# EAGLE board BP (EAGLE 7.7.0)
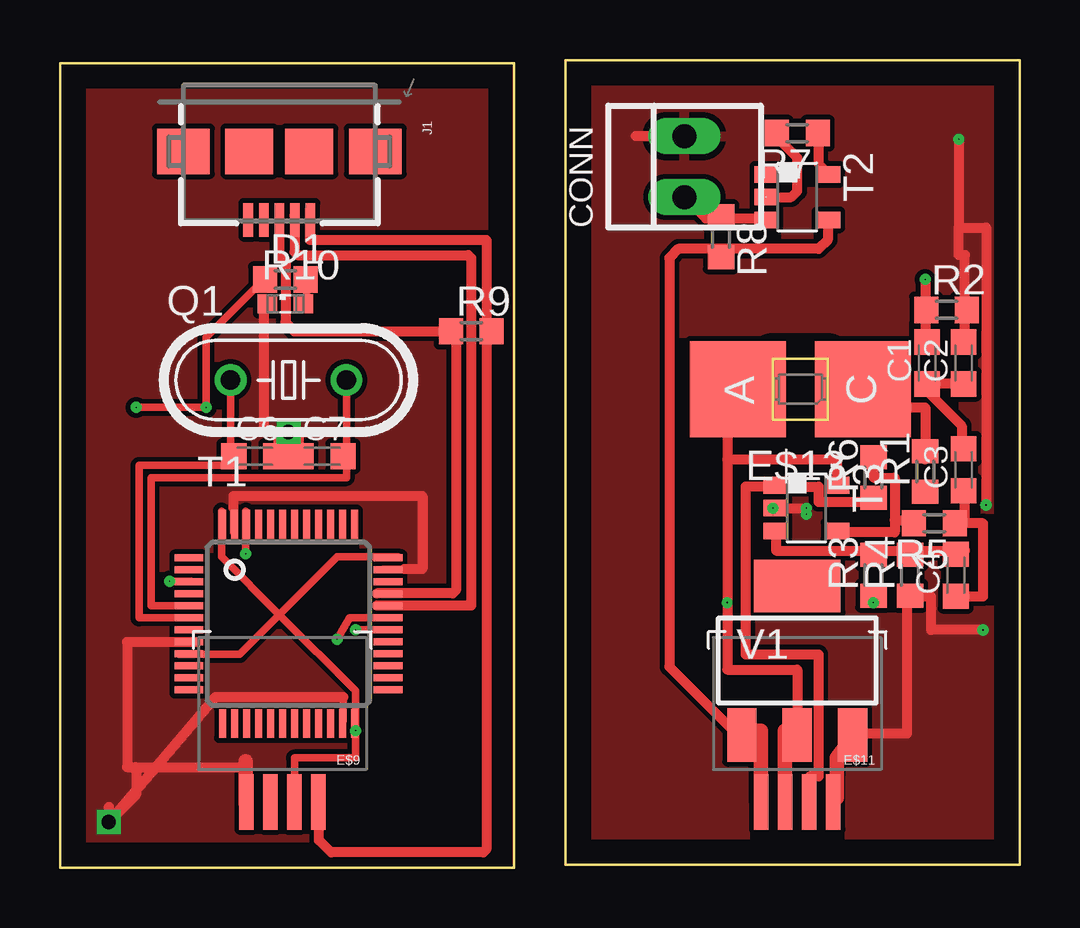
[diagram p0: board, top side]
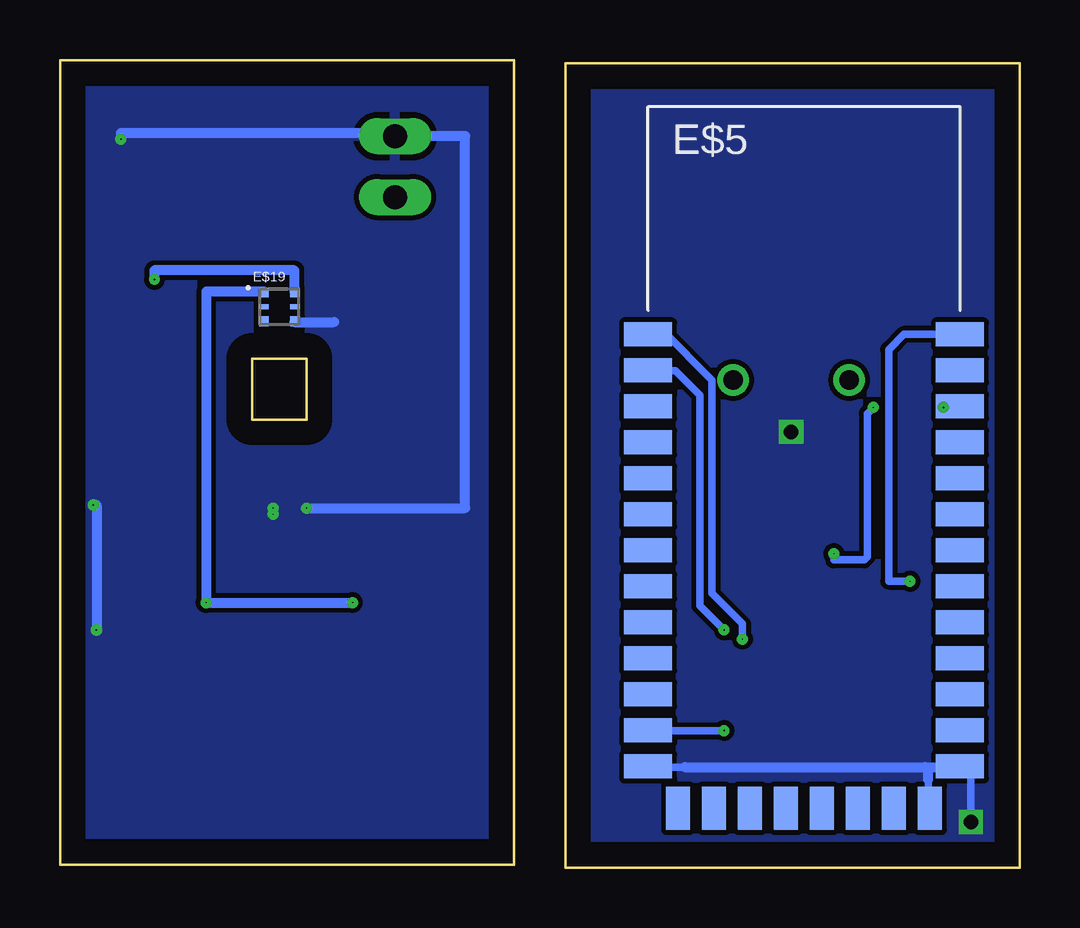
[diagram p1: board, bottom side, seen from below]

Size 40 x 33.66 mm. Coordinates in mm from the lower left corner, seen from the top.
Copper layers (1*16): Top 0.035mm / dielectric 1.5mm / Bottom 0.035mm
Design rules "default": minimum track width 10mil, minimum drill 24mil, track to track 8mil, track to pad 8mil, pad to pad 8mil, via to via 8mil, smd to smd 8mil, copper to edge 40mil, drill to drill 8mil, minimum pad ring 10mil, minimum via ring 8mil, stop-mask expansion 4mil, vias tented up to drill 0mil, thermal gap 10mil

## Footprints (pad centres in the part's own frame; a part is rotated, then mirrored left to right if it is on the bottom)
C0603K = smd 1.05 x 1.08: 1 -0.875,0; 2 0.875,0
22-23-2021 = drill 1 long: 1 -1.27,0; 2 1.27,0
R0603 = smd 1 x 1.1: 1 -0.85,0; 2 0.85,0
BLUETOOTH_SMD = smd 2 x 1: 1 -6.35,3.81; 2 -6.35,2.31; 3 -6.35,0.81; 4 -6.35,-0.69; 5 -6.35,-2.19; 6 -6.35,-3.69; 7 -6.35,-5.19; 8 -6.35,-6.69; 9 -6.35,-8.19; 10 -6.35,-9.69; 11 -6.35,-11.19; 12 -6.35,-12.69; 13 -6.35,-14.19; 22 6.65,-14.19; 23 6.65,-12.69; 24 6.65,-11.19; 25 6.65,-9.69; 26 6.65,-8.19; 27 6.65,-6.69; 28 6.65,-5.19; 29 6.65,-3.69; 30 6.65,-2.19; 31 6.65,-0.69; 32 6.65,0.81; 33 6.65,2.31; 34 6.65,3.81 | smd 1 x 1.8: 14 -5.1,-15.94; 15 -3.6,-15.94; 16 -2.1,-15.94; 17 -0.6,-15.94; 18 0.9,-15.94; 19 2.4,-15.94; 20 3.9,-15.94; 21 5.4,-15.94
PSP_TOUCH_CONNECTOR = smd 0.6 x 2.3: X1 1.5,2.85; X2 -0.5,2.85; Y1 -1.5,2.85; Y2 0.5,2.85
OSRAM-MINI-TOP-LED = smd 4 x 4: A 0,2.6; C 0,-2.6
PHODET_APDS-9008 = smd 0.4 x 0.4: 1 -0.65,0.6; 3 -0.65,-0.6; 4 0.65,-0.6; 6 0.65,0.6 | smd 0.4 x 0.2: 2 -0.65,0; 5 0.65,0
USB-AB-MICRO-SMD = smd 1.4 x 0.4: D+ 2.85,0; D- 2.85,0.65; GND 2.85,-1.3; ID 2.85,-0.65; VBUS 2.85,1.3 | smd 1.9 x 2.2: SHIELD1 0,4; SHIELD4 0,-4 | smd 1.9 x 2: SHIELD2 0,1.25; SHIELD3 0,-1.25
HC49/S = drill 0.813: 1 -2.413,0; 2 2.413,0
LED_SML0603 = smd 0.8 x 0.8: A 0.75,0; C -0.75,0
TQFP48_7X7 = smd 0.3 x 1.2: 1 -2.75,-4.15; 2 -2.25,-4.15; 3 -1.75,-4.15; 4 -1.25,-4.15; 5 -0.75,-4.15; 6 -0.25,-4.15; 7 0.25,-4.15; 8 0.75,-4.15; 9 1.25,-4.15; 10 1.75,-4.15; 11 2.25,-4.15; 12 2.75,-4.15; 25 2.75,4.15; 26 2.25,4.15; 27 1.75,4.15; 28 1.25,4.15; 29 0.75,4.15; 30 0.25,4.15; 31 -0.25,4.15; 32 -0.75,4.15; 33 -1.25,4.15; 34 -1.75,4.15; 35 -2.25,4.15; 36 -2.75,4.15 | smd 1.2 x 0.3: 13 4.15,-2.75; 14 4.15,-2.25; 15 4.15,-1.75; 16 4.15,-1.25; 17 4.15,-0.75; 18 4.15,-0.25; 19 4.15,0.25; 20 4.15,0.75; 21 4.15,1.25; 22 4.15,1.75; 23 4.15,2.25; 24 4.15,2.75; 37 -4.15,2.75; 38 -4.15,2.25; 39 -4.15,1.75; 40 -4.15,1.25; 41 -4.15,0.75; 42 -4.15,0.25; 43 -4.15,-0.25; 44 -4.15,-0.75; 45 -4.15,-1.25; 46 -4.15,-1.75; 47 -4.15,-2.25; 48 -4.15,-2.75
DBV_R-PDSO-G5 = smd 0.69 x 0.99: 1 -0.95,-1.29; 2 0,-1.29; 3 0.95,-1.29; 4 0.95,1.3; 5 -0.95,1.3
SOT223 = smd 1.219 x 2.235: 1 -2.311,-3.099; 2 0,-3.099; 3 2.311,-3.099 | smd 3.6 x 2.2: 4 0,3.099

## Placement (x,y rotation side)
C1  [C0603K]  36.14,21.03 90 top
C2  [C0603K]  37.67,21.03 90 top
C3  [C0603K]  37.67,16.59 90 top
C4  [C0603K]  37.34,12.19 90 top
C6  [C0603K]  8.13,17.14 0 top
C7  [C0603K]  10.92,17.14 0 top
CONN  [22-23-2021]  26.04,29.21 90 top
D1  [R0603]  9.4,24.51 0 top
E$5  [BLUETOOTH_SMD]  9.14,18.41 0 bottom
E$9  [PSP_TOUCH_CONNECTOR]  9.27,5.59 180 top
E$11  [PSP_TOUCH_CONNECTOR]  30.73,5.59 180 top
E$13  [OSRAM-MINI-TOP-LED]  30.86,19.94 90 top
E$19  [PHODET_APDS-9008]  30.86,23.37 0 bottom
J1  [USB-AB-MICRO-SMD]  9.14,29.84 270 top
Q1  [HC49/S]  9.53,20.32 0 top
R1  [R0603]  36.07,16.51 90 top
R2  [R0603]  36.96,23.24 0 top
R3  [R0603]  33.91,12.19 90 top
R4  [R0603]  35.43,12.19 90 top
R5  [R0603]  36.45,14.35 180 top
R6  [R0603]  33.91,16.26 90 top
R7  2k  [R0603]  30.73,30.61 180 top
R8  [R0603]  27.56,26.29 270 top
R9  [R0603]  17.15,22.35 0 top
R10  [LED_SML0603]  9.4,23.5 0 top
T1  [TQFP48_7X7]  9.53,10.16 270 top
T2  [DBV_R-PDSO-G5]  30.73,27.94 270 top
T3  [DBV_R-PDSO-G5]  31.12,14.99 270 top
V1  [SOT223]  30.73,8.64 0 top

## Library data of the parts
C1-C4 C6 C7 E$13 = adafruit
CONN = con-molex
D1 R1-R10 = eagle-ltspice
E$5 = Bluetooth HC-05
E$9 E$11 J1 = SparkFun-Connectors
E$19 = APDS-9008
Q1 = crystal
T1 = freescale
T2 T3 = 74xx-little-de
V1 = transistor-pnp

## Nets
GND: CONN.2
OSC1: Q1.1
OSC2: Q1.2
S$14: CONN.1

## Tracks (layer width: path | path; a pad name or v marks a point on that pad's centre or on a via)
3V3  (via drill 0.05 pad 0.03)
  Top 0.406: 28.45,19.94 27.81,19.94 27.81,17.02 | 27.81,17.02 v27.81,11.05 27.81,8.26 30.73,8.26 30.73,5.71 | 27.81,17.02 32.38,17.02 32.38,16 | 30.99,5.71 30.73,5.71 | 30.73,5.71 30.73,5.59
  Top 0.61: 30.23,2.79 30.23,5.71 30.99,5.71 30.99,5.08
  Bottom 0.406: v27.81,11.05 v33.91,11.05 33.91,24 31.5,24
3V32  (via drill 0.05 pad 0.03)
  Top 0.305: 4.95,8.89 7.49,8.89 9.14,10.54 | 6.73,14.86 6.73,12.95 9.14,10.54 | 14.1,12.95 11.56,12.95 9.14,10.54 | 9.14,10.54 12.32,7.37 v12.32,5.71 | v12.32,5.71 12.32,5.59 | v12.32,5.71 12.32,4.57 9.78,4.57 9.78,2.03
  Bottom 0.305: 15.49,5.71 v12.32,5.71
5V
  Top 0.406: 10.41,27.43 10.41,26.16 17.78,26.16 17.78,0.76 17.65,0.64 11.3,0.64 10.79,1.14 10.79,3.43
5V2
  Top 0.406: 32,27.05 32,26.16 31.62,25.78 25.78,25.78 25.4,25.4 25.4,8.38 28.32,5.46 28.45,5.46 28.45,5.59
  Top 0.61: 29.21,2.79 29.21,5.71 28.45,5.71 28.45,5.59 28.45,5.08
GND  (via drill 0.05, 0.06)
  Top 0.406: v29.72,14.99 v31.12,14.99 v31.12,14.73 | CONN.2 24,30.48 | 33.15,5.59 35.31,5.59 35.31,11.3 36.32,11.3 36.32,9.91 v38.48,9.91 | v37.46,30.35 37.46,26.67 | 37.72,21.84 37.72,25.53 37.46,25.53 37.46,26.67 | 37.46,26.67 38.61,26.67 v38.61,15.11
  Top 0.61: 32.38,2.92 32.38,4.57 33.15,5.59
  Bottom 0.406: v31.12,14.99 v31.12,14.73 | v29.72,14.99 23.11,14.99 23.11,30.48 26.29,30.48 26.29,30.61 37.46,30.61 v37.46,30.35 | v38.61,15.11 38.48,15.11 v38.48,9.91 | 30.23,22.73 28.58,22.73
  pour Top: 21.08,33.66 40,33.66 40,0.13 21.08,0.13
  pour Bottom: 21.08,33.66 40,33.66 40,0.13 21.08,0.13
GND2  (via drill 0.6)
  Top 0.305: 13.46,12.45 14.35,12.45 | 7.24,13.97 7.24,14.99 | 5.71,9.4 4.57,9.4 | 11.81,6.1 11.81,7.11 | 8.51,23.5 8.51,22.86
  Top 0.406: 14.35,12.45 15.11,12.45 15.11,15.49 7.24,15.49 7.24,14.99 | 5.71,9.4 2.79,9.4 2.79,4.19 3.17,4.19 | 7.75,3.81 7.75,4.19 3.17,4.19 | 11.81,7.11 6.48,7.11 v2.03,1.91 | 3.17,4.19 3.17,3.05 v2.03,1.91 | v2.03,1.91 2.03,2.54 | 8.51,23.5 8.51,18.16 v9.53,18.16 9.53,17.91
  Top 0.61: 7.75,2.67 7.75,3.81 7.75,4.45
  Top 1.27: 9.53,17.53 9.53,17.91
  Bottom 0.305: 3.81,2.67 3.81,3.68 | 15.11,4.19 13.97,4.19 | 3.94,4.19 3.17,4.19 2.79,4.19 2.03,4.19 v2.03,1.91
  Bottom 0.406: 3.81,3.68 3.81,4.06 3.94,4.19 | 13.97,4.19 3.17,4.19
  pour Top: 0.13,33.53 18.92,33.53 18.92,-1.02 0.13,-1.02
  pour Bottom: 0.13,33.53 18.92,33.53 18.92,-1.02 0.13,-1.02
KEY  (via drill 0.05 pad 0.03)
  Top 0.305: v4.57,11.94 5.46,11.94
  Bottom 0.305: 2.54,22.23 4.83,22.23 5.46,21.59 5.46,11.94 v4.57,11.94
LED  (via drill 0.05 pad 0.03)
  Top 0.305: v3.17,19.18 v6.1,19.18 6.1,22.1 8.51,24.51 | v7.75,13.08 7.75,14.86
  Bottom 0.305: v6.1,19.18 6.35,18.92 6.35,12.95 6.48,12.83 7.75,12.83 v7.75,13.08
OSC1
  Top 0.305: 4.83,10.41 3.3,10.41 3.3,16.76 7.11,16.76 Q1.1
OSC2
  Top 0.305: 4.83,10.92 3.81,10.92 3.81,16.26 11.94,16.26 Q1.2
RXD  (via drill 0.05 pad 0.03)
  Top 0.305: v11.56,9.53 12.06,10.41 14.1,10.41
  Bottom 0.305: 14.86,22.35 12.83,20.32 12.83,11.43 11.56,10.16 v11.56,9.53
S$1
  Top 0.305: 10.29,24.51 10.29,23.37
S$2
  Top 0.406: 9.78,27.18 9.78,25.65 9.91,25.53 17.02,25.53 17.15,25.4 17.15,10.92 13.21,10.92
S$3
  Top 0.406: 9.14,27.43 9.14,25.53 9.4,25.27 9.4,22.73 9.78,22.35 16.51,22.35 16.51,11.56 16.38,11.43 13.21,11.43
S$4
  Top 0.406: 34.8,19.18 36.07,19.18 36.07,17.02
S$5
  Top 0.406: 37.34,11.3 38.48,11.3 38.48,14.35 37.72,14.35 | 37.34,14.35 37.46,14.35 37.72,14.35 | 37.72,14.35 37.72,15.62
S$6
  Top 0.406: 29.72,15.88 28.58,15.88 28.58,8.89 31.62,8.89 31.62,3.81 31.24,3.81 31.24,2.92
S$7
  Top 0.406: 29.97,15.88 31.62,15.88 31.62,15.24 33.91,15.24 33.91,15.37
S$8
  Top 0.406: 33.91,17.02 33.91,16.26 34.8,16.26 34.8,14.48 | 34.8,14.48 34.8,13.97 32.51,13.97 | 34.8,14.48 35.56,14.48
S$9
  Top 0.406: 29.85,14.1 29.85,13.21 37.72,13.21
S$10
  Top 0.406: 36.2,20.19 36.2,19.81 37.59,18.41 37.59,17.4
S$11
  Top 0.406: 36.07,20.19 37.59,20.19
S$12
  Top 0.406: 29.21,27.94 30.48,27.94 30.73,28.19 30.73,29.59 29.72,30.61
S$13
  Top 0.406: 31.62,30.61 31.62,29.34 32.13,28.83
S$14
  Top 0.406: CONN.1 26.92,27.05 29.72,27.05
S$15  (via drill 0.05)
  Top 0.406: v36.07,24.51 36.07,21.97
  Bottom 0.406: 30.23,24 30.23,24.89 36.07,24.89 v36.07,24.51
TXD  (via drill 0.05 pad 0.03)
  Top 0.305: 13.97,9.91 v12.32,9.91
  Bottom 0.305: v12.32,9.91 13.33,10.92 13.33,19.68 14.35,20.7 15.37,20.7